# Altium PCB PCB1.PcbDoc
Units mm, origin at the board's own origin, x right, y up, seen from the top; angles counter-clockwise.
Board outline 152.4 x 101.6 mm, 2 copper layers (Top, Bottom); 10 components, 8 nets, 26 pads, 0 vias.
Unrouted connection lines stored in the file: 18.
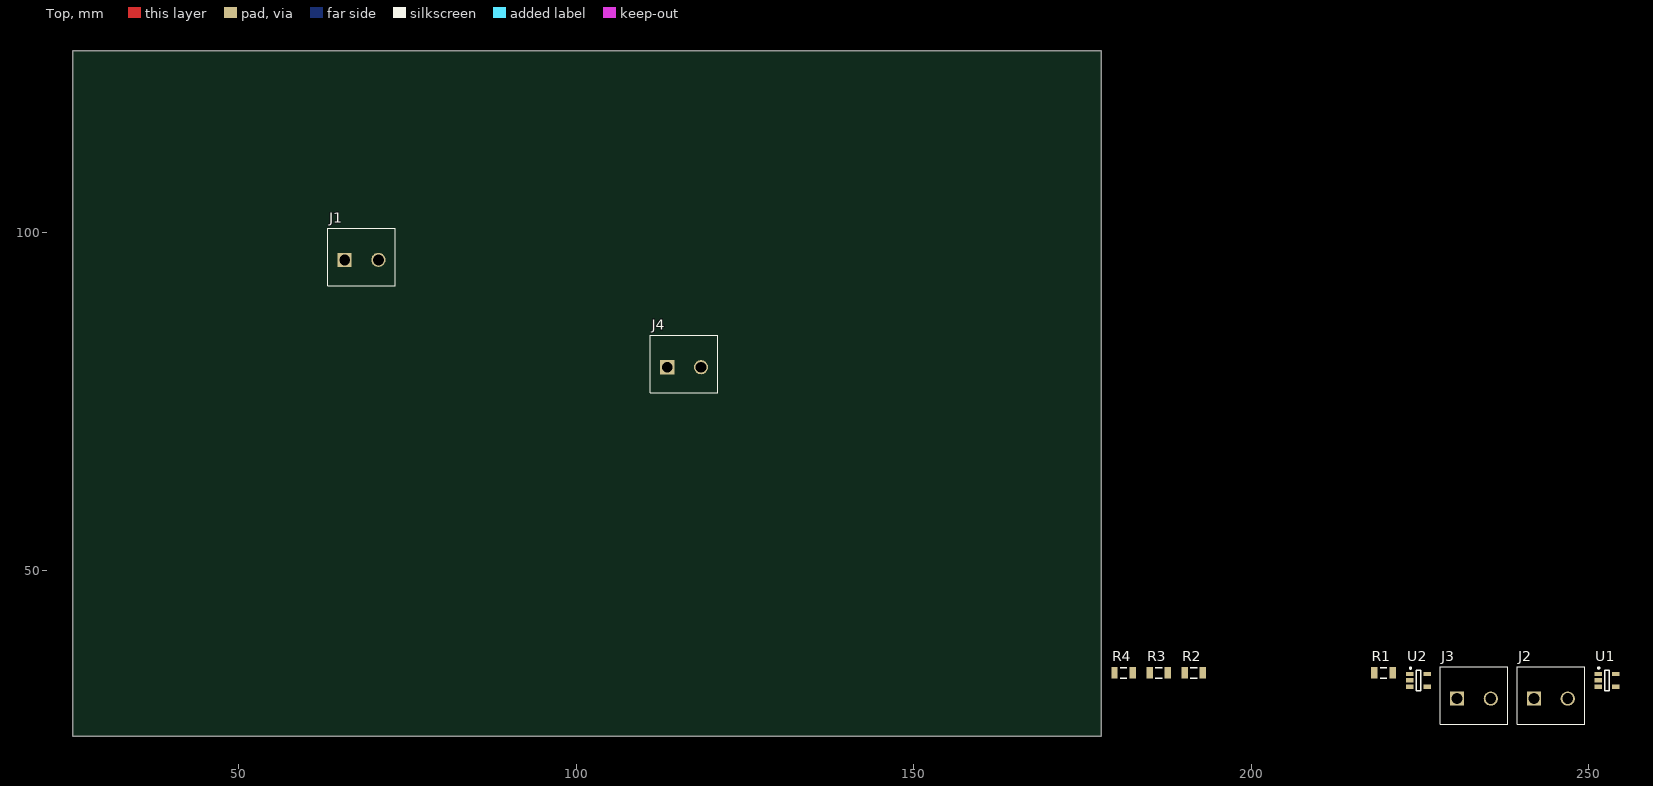
[diagram p0: Top view]
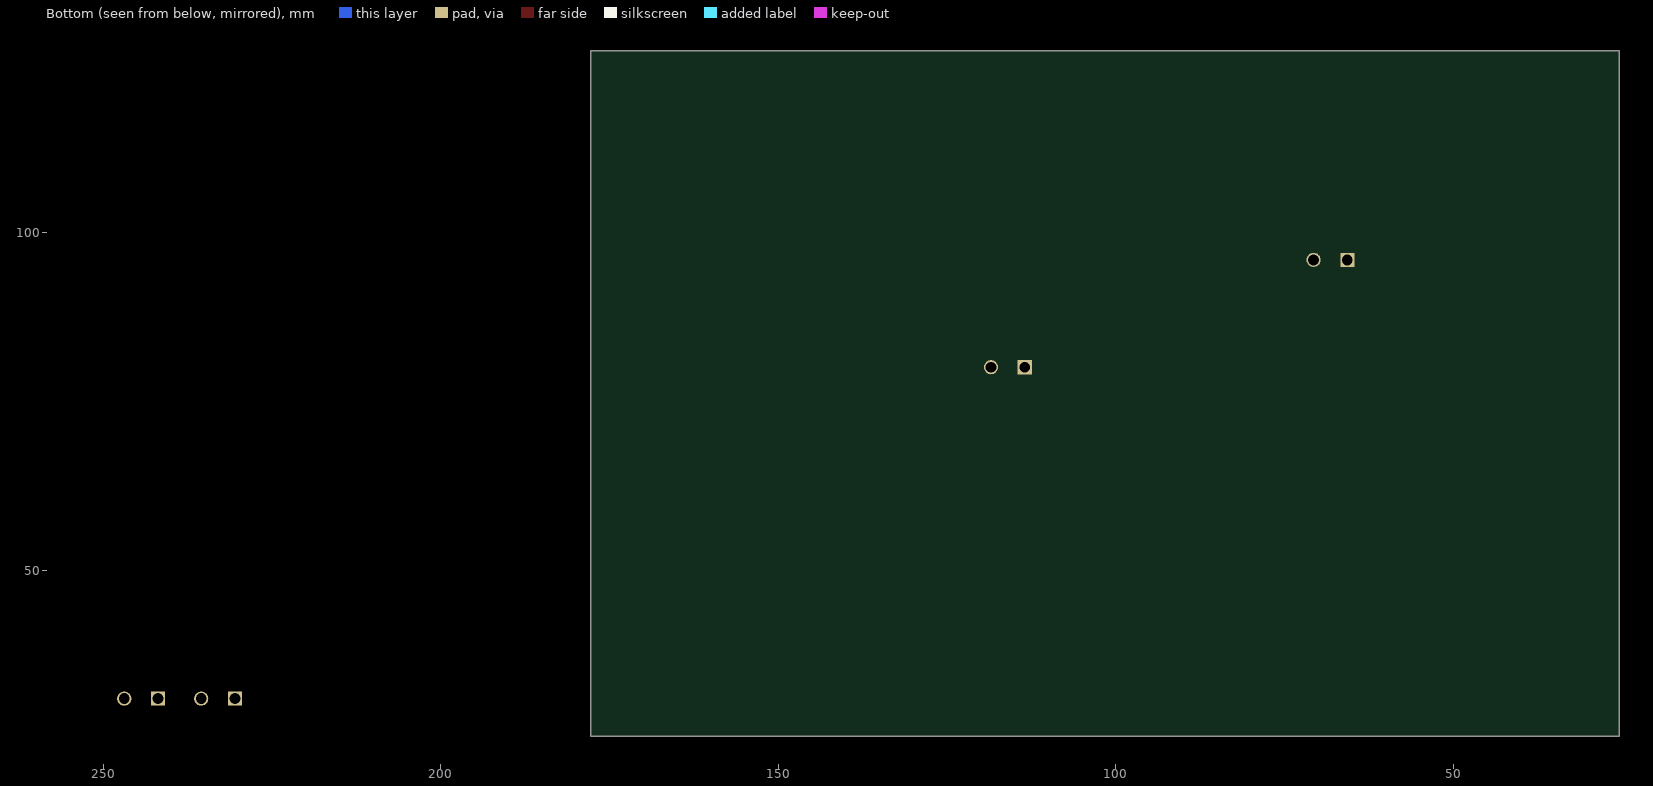
[diagram p1: Bottom view, seen from below]

## Layer stack, top to bottom
Top Solder: solder mask 0.0102, Solder Resist, Dk 3.5
Top: signal copper 0.0356
Dielectric 1: dielectric 0.32, FR-4, Dk 4.8
Bottom: signal copper 0.0356
Bottom Solder: solder mask 0.0102, Solder Resist, Dk 3.5

## Board outline
25.4,25.4 177.8,25.4 177.8,127 25.4,127

## Design rules (kind name [scope] priority, off if disabled: settings)
Clearance [All] p1: gap=0.254 ignorepadtopadclearanceinfootprint=FALSE except(0: Arc-Hole Track-Hole SMDPad-Hole THPad-Hole Via-Hole Fill-Hole Poly-Hole Region-Hole Text-Hole)
PolygonConnect [All] p1: connectstyle=Relief reliefconductorwidth=0.254 reliefentries=4 polygonreliefangle="90 Angle" airgapwidth=0.254
RoomDefinition Sheet1 [InComponentClass('Sheet1')] p1: confinementstyle=ConfineIn formatcopy=TRUE lockcomponents=FALSE outline 178.9,27 254.799,27 254.799,38.5 178.9,38.5
RoutingVias [All] p1: holewidth=0.711 width=1.27 viastyle="Through Hole" minholewidth=0.711 minwidth=1.27 maxholewidth=0.711 maxwidth=1.27
SolderMaskExpansion [All] p1: expansion=0.102
Width [All] p1: maxlimit=0.254 minlimit=0.254 preferedwidth=0.254
30 further rules are at their usual default settings.

## Components (designator, comment, footprint, x,y, rotation, side; value= is the part's Value field where it differs from the comment)
J1 "691311700002" 691311700002 68.2,96 r0 top
J2 "691311700002" 691311700002 244.4,31 r0 top
J3 "691311700002" 691311700002 233,31 r0 top
J4 "691311700002" 691311700002 116,80.1 r0 top
R1 "RES1206" RESC1206(3216)_L 219.6,34.8 r0 top
R2 "RES1206" RESC1206(3216)_L 191.5,34.8 r0 top
R3 "RES1206" RESC1206(3216)_L 186.3,34.8 r0 top
R4 "RES1206" RESC1206(3216)_L 181.1,34.8 r0 top
U1 "Texas Instruments INA138NA/3K" SOT23-5 252.699,33.7 r0 top
U2 "Texas Instruments INA138NA/3K" SOT23-5 224.8,33.7 r0 top

## Footprints (in the part's own frame and the unit in brackets; to place one, negate y for a bottom-side part, rotate by r counter-clockwise, add the part's x,y. Pads: shape width x height; smd on the part's side, far side on the other; paste and mask are expansions set on the pad)
691311700002 [mm] "5.00mm - Open Vertical PCB Header - 02p"
  rect 2.1x2.1 hole 1.6: 1(-2.5,0)
  round 2.1 hole 1.6: 2(2.5,0)
  silkscreen extent -5,-3.8 5,4.7, body extent -5,-3.8 5,4.7, height 12.01
RESC1206(3216)_L [mm]
  rect 0.95x1.7 smd: 1(-1.35,0) 2(1.35,0)
  silkscreen extent -0.5,-0.75 0.5,0.75, body extent -1.67,-0.87 1.67,0.87, height 0.75
SOT23-5 [mm] "SOT23, 5-Leads, Body 2.9x1.6mm, Pitch 0.95mm, Lead Span 2.8mm, IPC High Density"
  rect 1.1x0.65 smd: 1(-1.3,0.95) 2(-1.3,0) 3(-1.3,-0.95) 4(1.3,-0.95) 5(1.3,0.95)
  silkscreen extent -1.32,-1.5 0.35,1.95, body extent -1.6,-1.5 1.6,1.5, height 0.92

## Part data
J1 J2 J3 J4: "WR-TBL Terminal block - serie 3117 - 5.00mm", Manufacturer="Wurth Elektronik eiSos GmbH", ComponentLink1 Description=Manufacturer, ComponentLink1URL=http://www.we-online.com, ComponentLink2 Description=Datasheet, ComponentLink2URL=http://katalog.we-online.de/em/datasheet/6913117000xx.pdf, Created by="Karrer Zheng", Created Date="6 January 2014", NoPins=02, partNo=691311700002
R1 R2 R3 R4: library part CMP-1591-00005-1, "1206 (3216 Metric) Chip Resistor", Case-EIA=1206, Case-Metric=3216, PackageReference=RESC1206(3216)
U1 U2: library part INA138

## Nets (pads, with @x,y where several pads share a name; then routed paths per layer and width w, separated by ;. In a path a pad name is that pad's centre, name@x,y a point inside that pad or via, vN(x,y) a via of type N, cw(c..) or ccw(c..) an arc to the next point about the centre after c; other vN are vias at no path point)
GND: J2.1 J3.2 J4.2 R2.1 R4.1 U1.2 U1.4 U2.2
NetJ1_1: J1.1 U2.4
NetJ2_2: J2.2 U1.3
NetJ3_1: J3.1 R1.2 U1.1
NetJ4_1: J4.1 R3.2 U2.1
NetR1_1: R1.1 R2.2
NetR3_1: R3.1 R4.2
VCC: J1.2 U1.5 U2.3 U2.5